# Altium PCB TMC2209_V20.PcbDoc
Units mil, origin at the board's own origin, x right, y up, seen from the top; angles counter-clockwise.
Board outline 590 x 800 mil, 4 copper layers (Top Layer, Signal Layer 1, Signal Layer 2, Bottom Layer), stack 63.036 mil thick; 22 components, 29 nets, 87 pads, 57 vias.
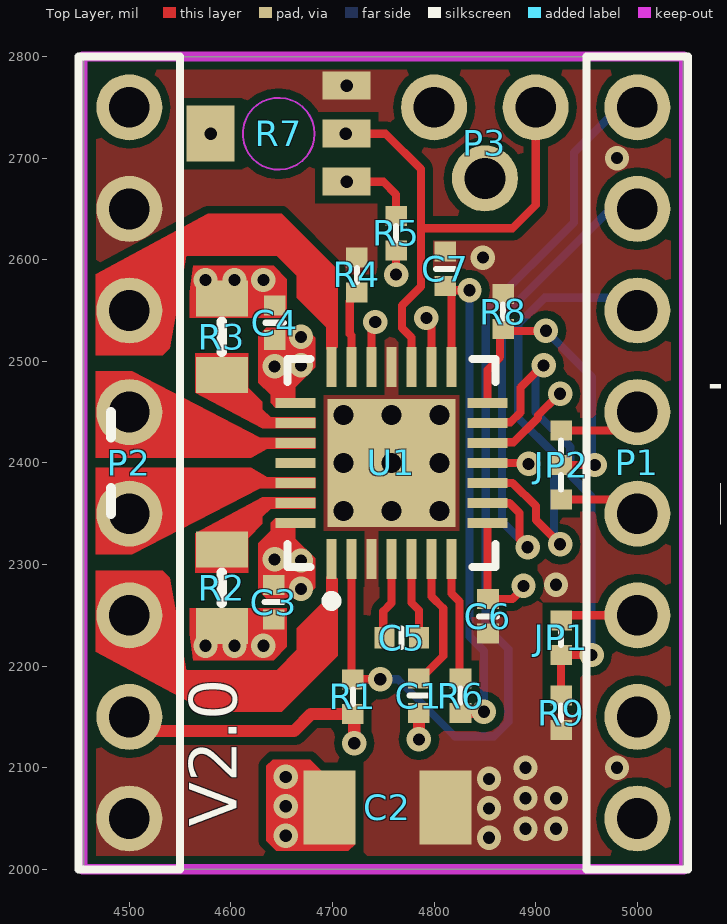
[diagram p0: Top Layer view]
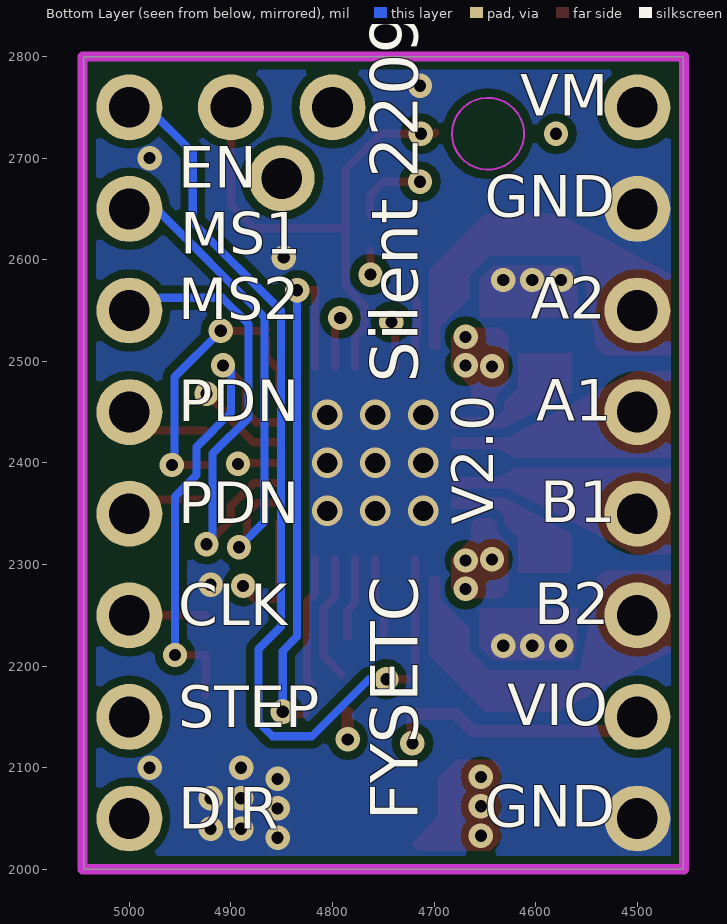
[diagram p1: Bottom Layer view, seen from below]
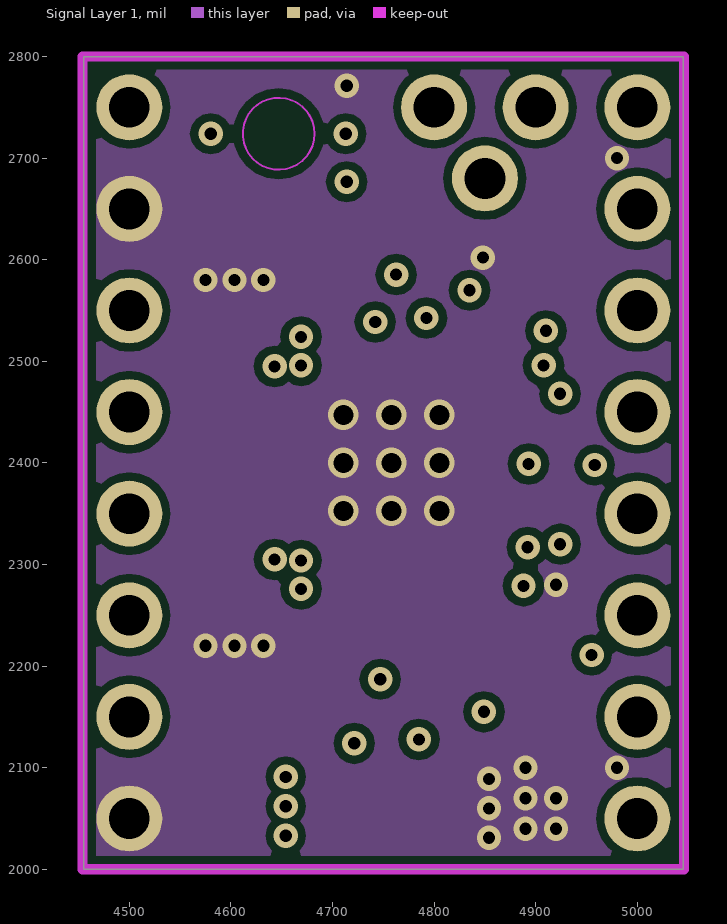
[diagram p2: Signal Layer 1]
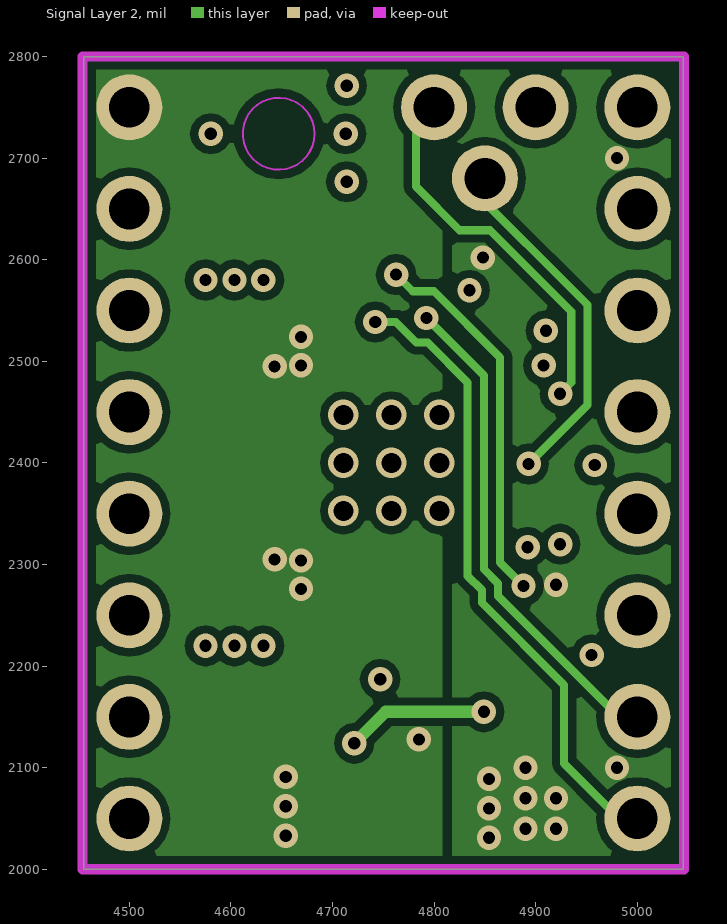
[diagram p3: Signal Layer 2]
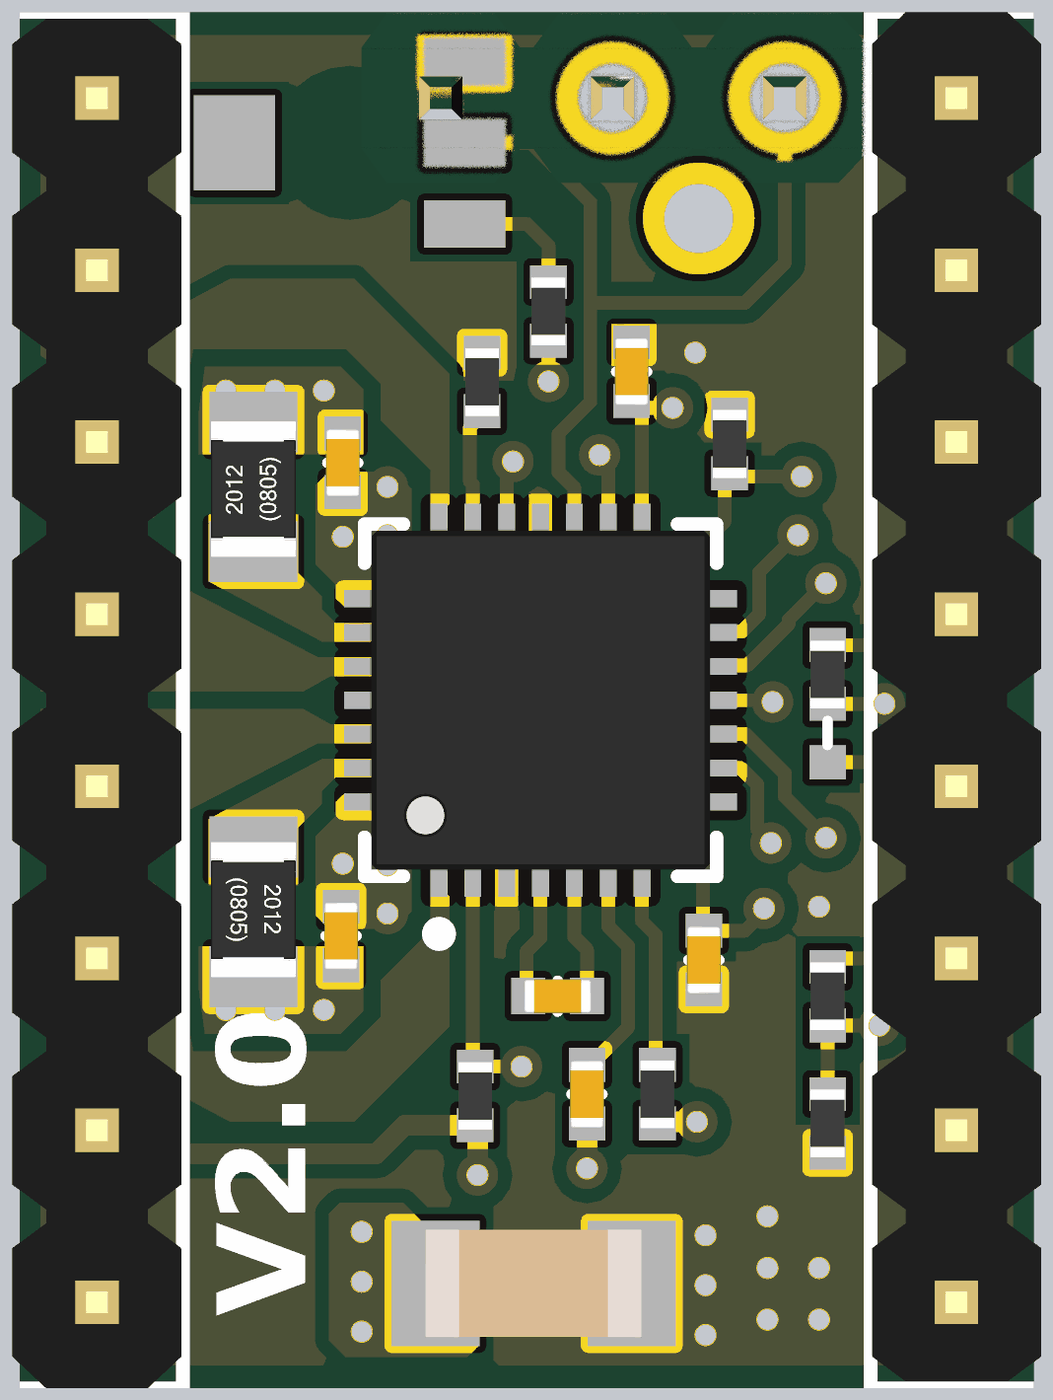
[diagram p4: 3D render of the assembled board from above, using the file's embedded part models]

## Layer stack, top to bottom
Top Solder: solder mask 0.4, Solder Resist, Dk 3.5
Top Layer: signal copper 1.4
Dielectric 1: core 10, FR-4, Dk 4.2
Signal Layer 1: signal copper 1.4173
Dielectric 3: prepreg 37.4016, Dk 4.2
Signal Layer 2: signal copper 1.4173
Dielectric 2: core 10, Dk 4.2
Bottom Layer: signal copper 1.4
Bottom Solder: solder mask 0.4, Solder Resist, Dk 3.5

## Board outline
4455,2000 5045,2000 5045,2800 4455,2800

## Design rules (kind name [scope] priority, off if disabled: settings)
Clearance [All] p1: gap=8 ignorepadtopadclearanceinfootprint=FALSE except(0: Arc-Hole Track-Hole SMDPad-Hole THPad-Hole Via-Hole Fill-Hole Poly-Hole Region-Hole Text-Hole)
PolygonConnect [All] p1: connectstyle=Direct reliefconductorwidth=10 reliefentries=4 polygonreliefangle="90 Angle" airgapwidth=10
RoutingVias [All] p1: holewidth=12 width=24 viastyle="Through Hole" minholewidth=10 minwidth=20 maxholewidth=20 maxwidth=50
SolderMaskExpansion [All] p1: expansion=4
Width [All] p1: maxlimit=50 minlimit=6 preferedwidth=8
30 further rules are at their usual default settings.

## Components (designator, comment, footprint, x,y, rotation, side; value= is the part's Value field where it differs from the comment)
C1 "100nF" CAP0402_NS 4785.03,2171 r90 top
C2 "4.7uF/35V" CAP1206 4754,2061 r180 top
C3 "100nF" CAP0402_NS 4642,2263 r90 top
C4 "100nF" CAP0402_NS 4643,2538 r270 top
C5 "22nF" CAP0402_NS 4768,2227.99 r0 top
C6 "4.7uF/6.3V" CAP0402_NS 4853,2249 r270 top
C7 "100nF" CAP0402_NS 4811,2591 r90 top
JP1 "Jumper-2P" jumper_2P_0402 4925,2228 r90 top
JP2 "Jumper-3P" jumper_3P_0402 4925,2415 r270 top
P1 "Header 8" "Header 1X8" 5000,2050 r90 top
P2 "Header 8" "Header 1X8" 4500,2750 r270 top
P3 "Header 3" "Header 1X3" 4900,2750 r180 top
R1 "20K" RES0402_NS 4720,2170 r270 top
R2 "0.11R" RES0805_NS 4591,2277 r270 top
R3 "0.11R" RES0805_NS 4591,2524 r90 top
R4 "100K" RES0402_NS 4724,2585 r270 top
R5 "10K" RES0402_NS 4762.63,2626 r270 top
R6 "NC" RES0402_NS 4826,2171 r270 top
R7 "Potentiometer" 4脚贴片电位器 4647,2724 r180 top
R8 "20K" RES0402_NS 4868,2549 r270 top
R9 "20K" RES0402_NS 4925,2154 r90 top
U1 "TMC2209" QFN50P500X500X100-28-EX 4758,2400 r90 top locked

## Footprints (in the part's own frame and the unit in brackets; to place one, negate y for a bottom-side part, rotate by r counter-clockwise, add the part's x,y. Pads: shape width x height; smd on the part's side, far side on the other; paste and mask are expansions set on the pad)
4脚贴片电位器 [mm]
  rect 1.2x0.7 smd: 1(-1.7,1.2) 2(-1.7,-1.2) 3(-1.7,0)
  rect 1.2x1.4 smd: 4(1.7,0)
  Keep-Out Layer circle w0.05: c0,0 r0.9
CAP0402_NS [mm]
  rect 0.5x0.54 smd: 1(-0.433,0) 2(0.433,0)
  silkscreen extent 0,-0.23 0,0.23, body extent -0.5,-0.25 0.5,0.25, height 0.5
CAP1206 [mm]
  rect 1.3x1.85 smd: 1(-1.45,0) 2(1.45,0)
  body extent -1.6,-0.8 1.6,0.8, height 0.77
"Header 1X3" [mm]
  round 1.65 hole 1.02: 1(0,0) 2(1.27,1.778) 3(2.54,0)
  body extent -1.27,-1.25 6.25,1.25, height 8.2
"Header 1X8" [mm]
  round 1.65 hole 1.02: 1(0,0) 2(2.54,0) 3(5.08,0) 4(7.62,0) 5(10.16,0) 6(12.7,0) 7(15.24,0) 8(17.78,0)
  silkscreen extent -1.27,-1.27 19.05,1.27, body extent -1.17,-1.25 19.05,1.25, height 8.2
jumper_2P_0402 [mm]
  rect 0.5x0.54 smd: 1(-0.433,0) 2(0.433,0)
  silkscreen extent -0.18,0 0.18,0, body extent -0.5,-0.25 0.5,0.25, height 0.5
jumper_3P_0402 [mm]
  rect 0.5x0.54 smd: 1(-0.433,0) 2(0.433,0) 3(1.297,0)
  silkscreen extent -0.18,0 1.04,0, body extent -0.5,-0.25 0.5,0.25, height 0.5
QFN50P500X500X100-28-EX [mm]
  rect 1x0.25 smd mask+0.15: 1(-2.4,1.5) 2(-2.4,1) 3(-2.4,0.5) 4(-2.4,0) 5(-2.4,-0.5) 6(-2.4,-1) 7(-2.4,-1.5) 15(2.4,-1.5) 16(2.4,-1) 17(2.4,-0.5) 18(2.4,0) 19(2.4,0.5) 20(2.4,1) 21(2.4,1.5)
  rect 0.25x1 smd mask+0.15: 8(-1.5,-2.4) 9(-1,-2.4) 10(-0.5,-2.4) 11(0,-2.4) 12(0.5,-2.4) 13(1,-2.4) 14(1.5,-2.4) 22(1.5,2.4) 23(1,2.4) 24(0.5,2.4) 25(0,2.4) 26(-0.5,2.4) 27(-1,2.4) 28(-1.5,2.4)
  rect 3.2x3.2 smd mask+0.15: EXPAD(0,0)
  silkscreen extent -3.57,-2.6 2.6,2.6, body extent -2.52,-2.52 2.52,2.52, height 0.9
RES0402_NS [mm]
  rect 0.5x0.54 smd: 1(-0.433,0) 2(0.433,0)
  silkscreen extent -0.18,0 0.18,0, body extent -0.5,-0.25 0.5,0.25, height 0.5
RES0805_NS [mm]
  rect 0.9x1.3 smd: 1(-0.958,0) 2(0.958,0)
  silkscreen extent -0.38,0 0.38,0, body extent -1.03,-0.62 0.97,0.63, height 0.44

## Part data
C1 C2 C3 C4 C5 C6 C7: library part Capacitor
P1 P2: "Header, 8-Pin", LatestRevisionDate=17-Jul-2002, LatestRevisionNote="Re-released for DXP Platform.", Publisher="Altium Limited"
P3: "Header, 3-Pin", LatestRevisionDate=17-Jul-2002, LatestRevisionNote="Re-released for DXP Platform.", Publisher="Altium Limited"
R1 R2 R3 R4 R5 R6 R8 R9: library part Resistor

## Via types
v1: diameter 24, hole 12, Top Layer to Bottom Layer, tented both sides, 48 vias
v2: diameter 30, hole 20, Top Layer to Bottom Layer, 9 vias

## Nets (pads, with @x,y where several pads share a name; then routed paths per layer and width w, separated by ;. In a path a pad name is that pad's centre, name@x,y a point inside that pad or via, vN(x,y) a via of type N, cw(c..) or ccw(c..) an arc to the next point about the centre after c; other vN are vias at no path point)
5VOUT: C6.1 R5.2 U1.8 | length 508
  Top Layer w8: v1(4762.63,2585.35) R5.2 ; C6.1@4852.49,2266.57 U1.8 ; C6.1 4877.06,2266.06 v1@4888,2277
  Signal Layer 2 w8: v1(4762.63,2585.35) 4778.98,2569 4799.89,2569 4865,2503.89 4865,2302 v1(4888,2279)
CLK: JP1.1 R9.2 U1.13 | length 474.9
  Top Layer w8: U1.13 4853.27,2440.16 4853.43,2440 4875.32,2440 4885.11,2449.79 4885.11,2474.37 v1@4907.75,2497 ; R9.2 JP1.1 v1@4954.05,2210.95
  Bottom Layer w8: v1@4905.75,2498 4899.94,2492.2 4899.94,2449.89 4934.05,2415.78 4934.05,2388.01 4955.05,2367.01 v1(4955.05,2210.95)
  other v1: 4907.75,2496
DIAG: P3.2 U1.11 | length 386.9
  Top Layer w8: U1.11 v1@4885.06,2400
  Signal Layer 2 w8: P3.2@4832,2680 4832,2674.63 4951,2555.63 4951,2457 v1(4893,2399)
DIR: P1.1 U1.19 | length 656.4
  Top Layer w8: U1.19 4738.31,2539.06 v1@4742,2542.75
  Signal Layer 2 w8: v1(4742,2538.75) 4762.26,2538.75 4782.43,2518.58 4793.74,2518.58 4833,2479.33 4833,2288.75 4847,2274.75 4847,2262.37 4928,2181.37 4928,2104 P1.1@4982,2050
EN: P1.8 R1.1 U1.2 | length 968.9
  Top Layer w8: R1.1@4718.63,2187.05 U1.2 ; R1.1 v1(4746.95,2187.05)
  Bottom Layer w8: v1(4746.95,2187.05) 4764.26,2187.05 4820.3,2131 4858.94,2131 4873,2145.06 4873,2217 4850.85,2239.15 4850.85,2550.04 4937.52,2636.72 4937.52,2705.52 P1.8@4982,2750
GND: C2.1 C3.1 C4.1 C6.2 C7.2 P2.2 P2.8 R2.2 R3.2 R4.1 R7.2 R8.1 R9.1 U1.3 U1.18 U1.EXPAD
  other v1: 4854,2031 4890,2040 4920,2040 4854,2060 4890,2070 4920,2070 4854,2089 4890,2100 4980,2100 4575,2220 4603.5,2220 4632,2220 4920,2280 4575,2580 4603.5,2580 4632,2580 4848,2602.05 4980,2700 4713.93,2771.24
  other v2: 4710.76,2352.76 4758,2352.76 4805.24,2352.76 4710.76,2400 4758,2400 4805.24,2400 4710.76,2447.24 4758,2447.24 4805.24,2447.24
INDEX: P3.3 U1.12 | length 459.9
  Top Layer w8: U1.12@4853.43,2420.31 4878.26,2420.31 4901.11,2443.17 4901.17,2443.17 4902.37,2444.37 4902.37,2446.86 4920.51,2465 v1@4923,2465
  Signal Layer 2 w8: P3.3@4782,2750 4782,2672 4825,2629 4855,2629 4935,2549 4935,2479 v1(4924,2468) ; v1@4921,2468 v1@4921.5,2468.5 ; v1@4923,2465 v1@4923.5,2465.5 ; v1@4925,2465 v1@4926,2466
MS1: P1.7 U1.9 | length 469
  Top Layer w8: U1.9 4874.38,2360.63 4884.17,2350.84 4884.17,2324.83 v1(4892,2317)
  Bottom Layer w8: v1(4892,2317) 4866.85,2342.15 4866.85,2543.41 4973.43,2650 P1.7@4982,2650
MS2: P1.6 U1.10 | length 453.3
  Top Layer w8: U1.10 4877.32,2380.32 4900.17,2357.46 4900.17,2343.83 v1(4924,2320)
  Bottom Layer w8: v1(4924,2320) 4918.05,2325.95 4918.05,2409.16 4882.85,2444.36 4882.85,2536.79 4908.56,2562.5 4969.5,2562.5 P1.6@4982,2550
NetC1_2: C1.2 U1.6 | length 125.8
  Top Layer w8: C1.2@4791,2192 4809,2210 4809,2257 4797.37,2268.63 U1.6
NetC5_1: C5.1 U1.4 | length 80.8
  Top Layer w8: C5.1@4749.94,2228 4749.94,2253.94 4758,2262 U1.4
NetC5_2: C5.2 U1.5 | length 79.6
  Top Layer w8: U1.5 4777.69,2262.32 4785,2255 C5.2@4785,2228.97
NetJP1_2: JP1.2 P1.3 | length 57
  Top Layer w8: JP1.2@4925,2250 P1.3@4982,2250
NetJP2_1: JP2.1 P1.5 | length 82.4
  Top Layer w8: JP2.1 4982.05,2432.05 P1.5
NetJP2_3: JP2.3 P1.4 | length 80.8
  Top Layer w8: JP2.3 4986.05,2363.95 P1.4
NetR2_1: R2.1 U1.27
NetR3_1: R3.1 U1.23
NetR5_1: R5.1 R7.1 | length 75.2
  Top Layer w8: v1(4713.93,2676.76) 4750.24,2676.76 4762.63,2664.37 R5.1
OUTA1: P2.4 U1.24
OUTA2: P2.3 U1.21
OUTB1: P2.5 U1.26
OUTB2: P2.6 U1.1
SPREAD: R6.1 U1.7 | length 128.4
  Top Layer w8: U1.7 4817.06,2271.57 4825,2263.63 4825,2185.95 R6.1@4821.05,2182
STDBY: R4.2 U1.20 | length 76.5
  Top Layer w8: U1.20 4718.63,2525.43 4717,2527.06 4717,2558.95 R4.2@4725,2566.95
STEP: P1.2 U1.16 | length 520.4
  Top Layer w8: v1@4793.69,2542.27 4797.37,2538.58 U1.16
  Signal Layer 2 w8: v1(4792.37,2542.58) 4849,2485.95 4849,2295.37 4863,2281.37 4863,2269 P1.2@4982,2150
UART: JP2.2 R8.2 U1.14 | length 298.9
  Top Layer w8: U1.14 4852.49,2491.43 4865,2503.94 4865,2521.95 ; R8.2@4865,2531.95 4866.95,2530 v1(4910,2530) ; JP2.2 v1(4958.05,2397.95)
  Bottom Layer w8: v1(4910,2530) 4955.52,2484.48 4955.52,2400.48 v1(4958.05,2397.95)
VCC_IO: C7.1 P2.7 R1.2 R6.2 U1.15 | length 949
  Top Layer w8: C7.1@4816,2569.94 v1(4834.85,2569.94) v1@4835.85,2569.94 ; U1.15 C7.1@4817.06,2567.94 ; R6.2 4827,2152.95 R6.2@4829.05,2155
  Top Layer w12: P2.7 4500,2136.24 4662.24,2136.24 4678.95,2152.95 R1.2 4721.37,2151.59 v1(4721.37,2124) ; R6.2@4829.05,2155 v1(4849,2155)
  Signal Layer 2 w12: v1(4721.37,2124) 4752.37,2155 v1(4849,2155)
  Bottom Layer w8: v1(4834.85,2569.94) 4834.85,2452 4834.85,2232.53 4835,2232.37 4835,2229 4849,2215 v1(4849,2155)
VM: C1.1 C2.2 C3.2 C4.2 P2.1 U1.22 U1.28 | length 26.1
  Top Layer w12: v1(4785.03,2127.86) C1.1
  other v1: 4654,2033 4654,2062 4654,2091 4669,2276 4669,2304 4643,2305 4643,2495 4669,2496 4669,2524
VREF: P3.1 R7.3 U1.17 | length 526.8
  Top Layer w8: R7.3@4698.93,2725 4699.93,2724 v1(4713,2724) ; R7.3 4752.29,2724 4787,2689.29 4787,2631 ; U1.17 4777.69,2523.33 4768.37,2532.64 4768.37,2554.87 4787,2573.5 4787,2631 ; P3.1 4900,2654 4877,2631 4787,2631
pads on no net: R7.4 U1.25
copper on no net:
  other v1: 4580.07,2724

## Polygon pours and split planes (outlines as drawn)
GND on Signal Layer 2 "Signal Layer 2-GND" (solid, pour order 10): 5044,2800 5044,2002 4817.99,2002 4817.99,2800
VM on Signal Layer 2 "Signal Layer 2-VM" (solid, pour order 2): 4454,2800 4454,2000 4805,2000 4808,1997 4808,2799 4807,2800
GND on Signal Layer 1 "Signal Layer 1-GND" (solid, pour order 4): 4450,2800 4450,2000 5046,2000 5046,2800
GND on Bottom Layer "Bottom Layer-GND" (solid, pour order 6): 4454,2800 4454,2000 5048,2000 5048,2798 5050,2800
GND on Top Layer "Top Layer-GND" (solid, pour order 8): 4454,2800 4457,2797 4457,2000 5046,2000 5044,2002 5044,2800

## Keep-outs
Keep-Out Layer:
  lines w10: 4454,2000 4454,2800 5046,2800 5046,2000 4454,2000

## Other copper
Top Layer:
  region net VM: 4641,2108 4635,2102 4635,2028 4644.75,2018.25 4715.69,2018.25 4722.22,2024.78 4696,2052.57 4696,2090 4678,2108
  region net OUTB1: 4683,2386 4636,2386 4620,2395 4577.86,2395 4467,2395 4467,2310 4503,2310 4628.64,2375 4683,2375
  region net OUTB2: 4665,2216 4665,2237.5 4694,2266.5 4694,2288 4703,2288 4705,2286 4705,2210 4650,2155 4577.33,2155 4467,2214.09 4467,2294 4533,2294 4540,2287 4555.97,2196 4645,2196
  region net NetR2_1: 4683,2355 4639,2355 4631,2347 4631,2340 4617,2326 4617,2292 4565,2292 4565,2331 4631.05,2366 4683,2366
  region net VM: 4683,2277 4673,2267 4635,2267 4627,2275 4627,2321 4639,2333 4639,2341 4643.5,2345.5 4658.96,2345.5 4663.51,2340.94 4663.51,2325.49 4683,2306
  region net GND: 4559.28,2231.5 4559.28,2257 4655,2257 4655,2219 4642,2206 4562.78,2206
  region net GND: 4559.28,2568.5 4559.28,2543 4655,2543 4655,2581 4642,2594 4562.78,2594
  region net OUTA2: 4665,2584 4665,2562.5 4694,2533.5 4694,2512 4703,2512 4705,2514 4705,2590 4650,2645 4577.33,2645 4467,2585.91 4467,2506 4533,2506 4540,2513 4555.97,2604 4645,2604
  region net VM: 4683,2523 4673,2533 4635,2533 4627,2525 4627,2479 4639,2467 4639,2459 4643.5,2454.5 4658.96,2454.5 4663.51,2459.06 4663.51,2474.51 4683,2494
  region net NetR3_1: 4683,2445 4639,2445 4631,2453 4631,2460 4617,2474 4617,2508 4565,2508 4565,2469 4631.05,2434 4683,2434
  region net OUTA1: 4683,2414 4636,2414 4620,2405 4577.86,2405 4467,2405 4467,2490 4503,2490 4628.64,2425 4683,2425

## Silkscreen, mask and mechanical layers (free items; w line width, h text height)
Top Overlay:
  lines w10: 4482,2350 4482,2375 ; 4482,2425 4482,2450
  text "TX" at 5072,2423 h70
  text "RX" at 5076,2325.49 h70
  text "V2.0" at 4621,2042 h80 r90
Bottom Overlay:
  text "VM" at 4615.09,2728.08 h70
  text "EN" at 4952,2657 h70
  text "GND" at 4649.93,2628.7 h70
  text "MS1" at 4950,2592 h70
  text "A2" at 4604.98,2527.87 h70
  text "MS2" at 4951.88,2527.43 h70
  text "Silent 2209" at 4701,2479 h80 r270
  text "A1" at 4599.34,2427.76 h70
  text "PDN" at 4951.88,2427.14 h70
  text "V2.0" at 4628,2339 h70 r270
  text "B1" at 4595.7,2327.66 h70
  text "PDN" at 4951.88,2326.86 h70
  text "B2" at 4601.33,2227.56 h70
  text "CLK" at 4951.88,2226.57 h70
  text "VIO" at 4627.77,2128.18 h70
  text "STEP" at 4951.88,2126.29 h70
  text "FYSETC" at 4701,2048 h80 r270
  text "GND" at 4649.93,2028.08 h70
  text "DIR" at 4951.88,2026 h70